# Altium PCB PCB1.PcbDoc
Units mm, origin at the board's own origin, x right, y up, seen from the top; angles counter-clockwise.
Board outline 70 x 55 mm, 2 copper layers (Top Layer, Bottom Layer); 32 components, 37 nets, 134 pads, 36 vias.
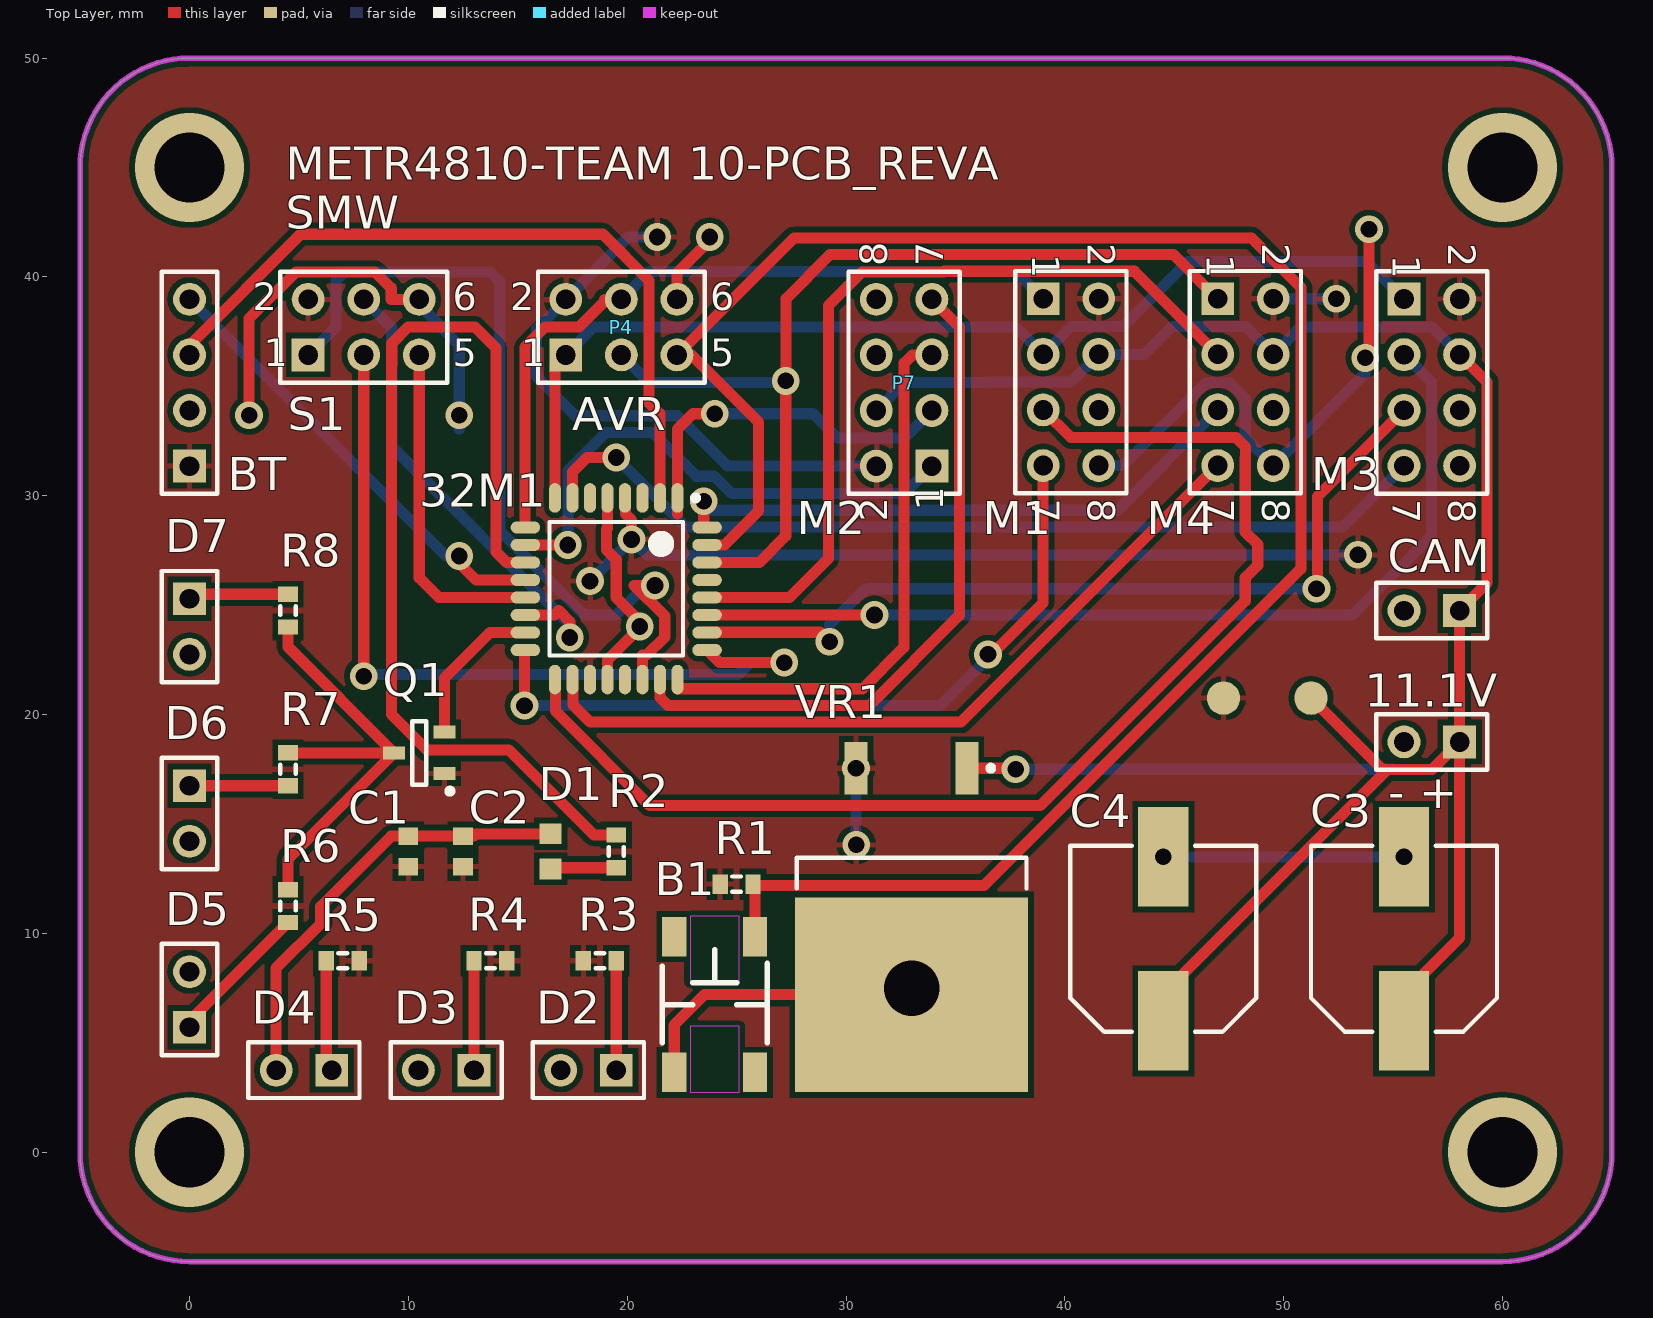
[diagram p0: Top Layer view]
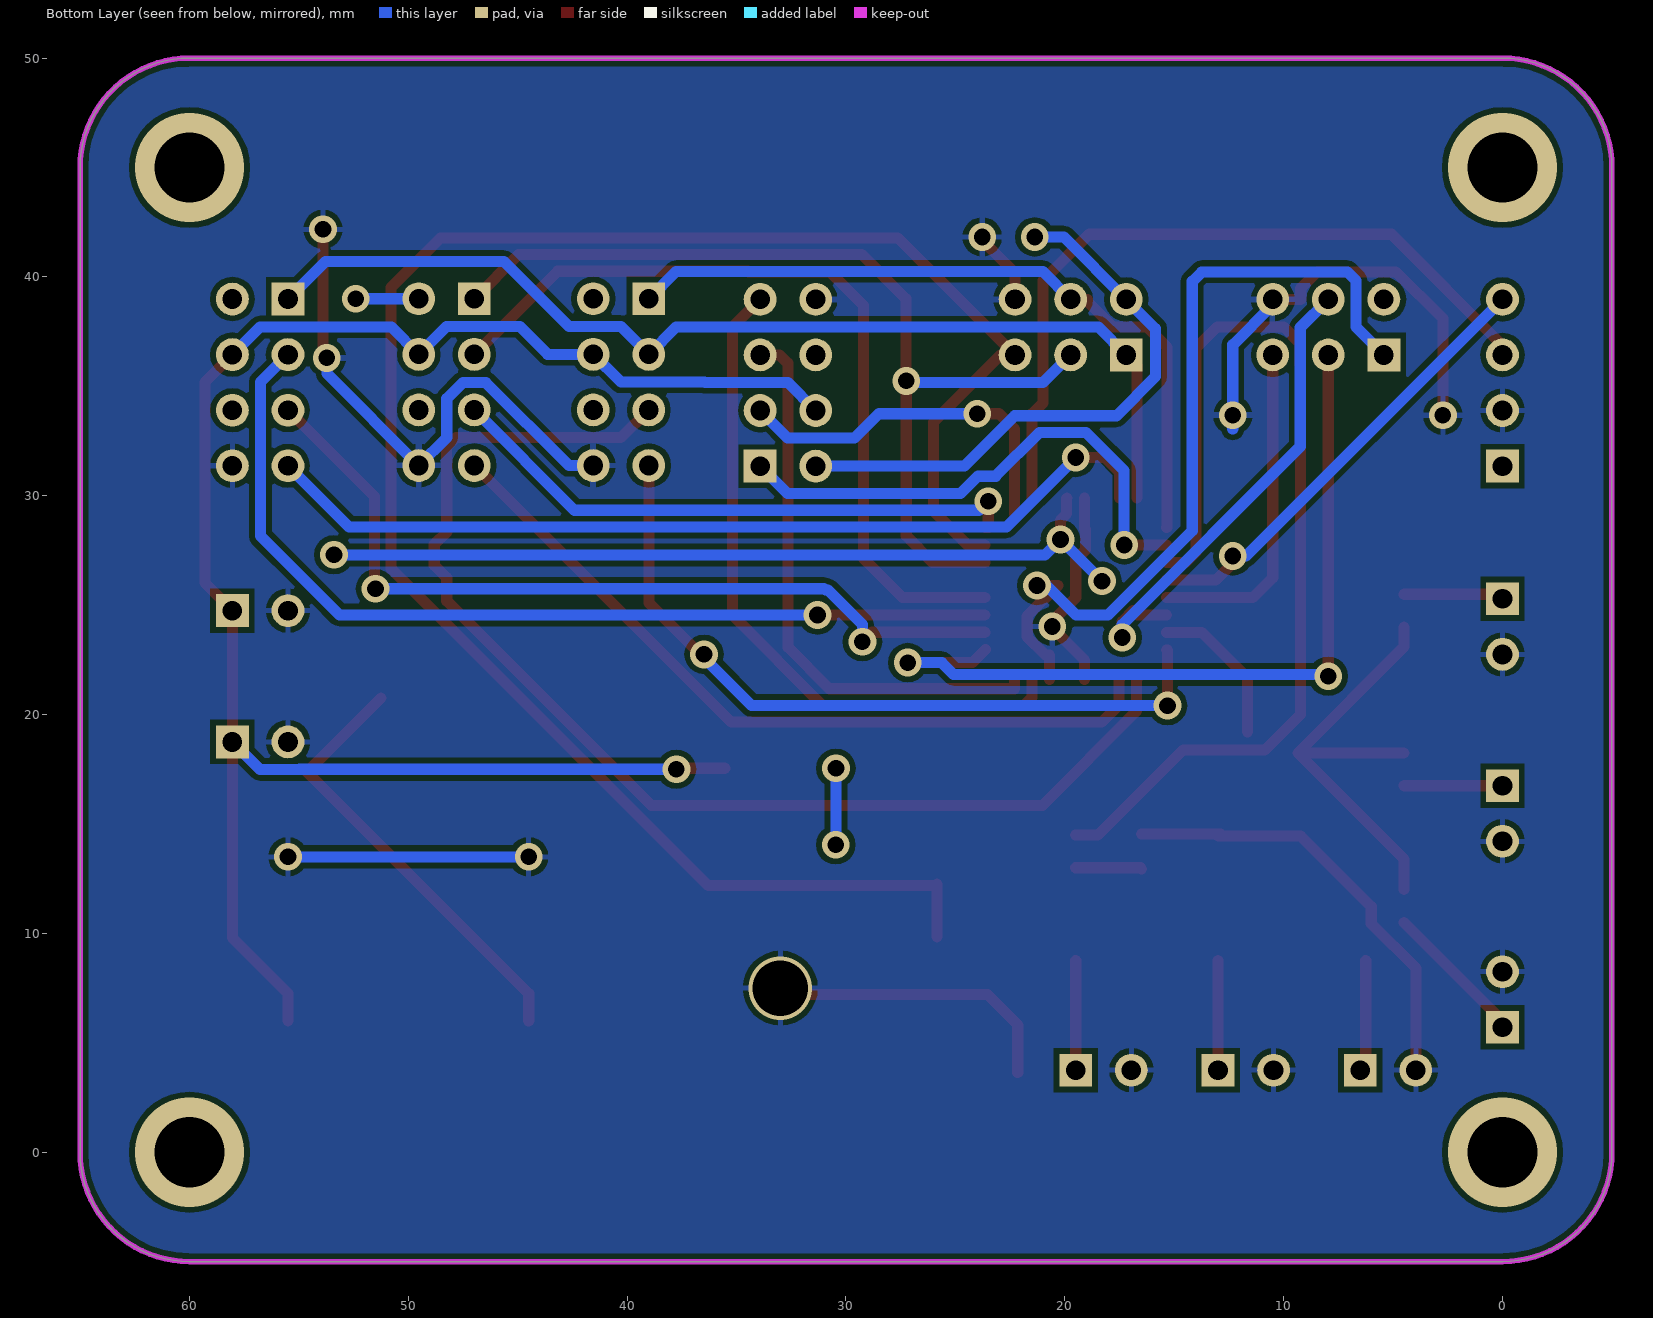
[diagram p1: Bottom Layer view, seen from below]

## Layer stack, top to bottom
Top Solder: solder mask 0.0102, Solder Resist, Dk 3.5
Top Layer: signal copper 0.0356
Dielectric 1: dielectric 0.32, FR-4, Dk 4.8
Bottom Layer: signal copper 0.0356
Bottom Solder: solder mask 0.0102, Solder Resist, Dk 3.5

## Board outline
-5,0 -5,45 cw(c0,45) 0,50 60,50 cw(c60,45) 65,45 65,0 cw(c60,0) 60,-5 0,-5 cw(c0,0)

## Design rules (kind name [scope] priority, off if disabled: settings)
Clearance [All] p1: gap=0.254
HoleSize [All] p1: absolutevalues=TRUE maxlimit=4.064 minlimit=0.762 maxpercent=80.000 minpercent=20.000
HoleToHoleClearance [All] p1: gap=0.152 allowstackedmicrovias=TRUE
MinimumSolderMaskSliver [All] p1: minsoldermaskwidth=0.01
PolygonConnect [All] p1: connectstyle=Relief reliefconductorwidth=0.254 reliefentries=4 polygonreliefangle="90 Angle" airgapwidth=0.254
RoomDefinition Sheet1 [InComponentClass('Sheet1')] p1: confinementstyle=ConfineIn formatcopy=TRUE lockcomponents=FALSE outline -1.75,1.75 61,1.75 61,44.5 -1.75,44.5
RoutingVias [All] p1: holewidth=0.762 width=1.27 viastyle="Through Hole" minholewidth=0.762 minwidth=1.27 maxholewidth=1.524 maxwidth=3.048
SilkToSilkClearance [All] p1: silktosilkclearance=0.01
SilkToSolderMaskClearance [IsPad] p1: minsilkscreentomaskgap=0.01 clearancetoexposedcopper=TRUE
SolderMaskExpansion [All] p1: expansion=0.102
Width [All] p1: maxlimit=2.032 minlimit=0.254 preferedwidth=0.508
25 further rules are at their usual default settings.

## Components (designator, comment, footprint, x,y, rotation, side; value= is the part's Value field where it differs from the comment)
32M1 "ATmega32M1-AU" 32A_L 19.5,25.75 r270 top (schematic designator U1)
"- +" "Header 2" HDR1X2 58.04,18.75 r180 top (schematic designator P3)
B1 "Button" "SMT Tactile Button" 24,6.75 r90 top
BT "Header 4" HDR1X4 0,31.355 r90 top (schematic designator P8)
C1 "Cap" 1608[0603] 10,13.75 r270 top
C2 "Cap" 1608[0603] 12.5,13.75 r270 top
C3 "Cap Pol2" CAPAE9983X105M 55.5,9.75 r90 top
C4 "Cap Pol2" CAPAE9983X105M 44.5,9.75 r90 top
CAM "Header 2" HDR1X2 58.04,24.75 r180 top (schematic designator P2)
D1 "LED1" L0603 16.5,13.75 r90 top
D2 "LED1" HDR1X2 19.5,3.75 r180 top
D3 "LED1" HDR1X2 13,3.75 r180 top
D4 "LED1" HDR1X2 6.5,3.75 r180 top
D5 "LED1" HDR1X2 0,5.71 r90 top
D6 "LED1" HDR1X2 0,16.75 r270 top
D7 "LED1" HDR1X2 0,25.29 r270 top
M1 "Header 4X2" HDR2X4 39.01,39 r270 top (schematic designator P5)
M3 "Header 4X2" HDR2X4 55.5,38.99 r270 top (schematic designator P9)
M4 "Header 4X2" HDR2X4 46.985,39 r270 top (schematic designator P10)
P4 "AVR" HDR2X3 17.195,36.435 r0 top
P7 "M2" HDR2X4 33.925,31.355 r90 top
Q1 "MOSFET-P" SOT23-3 10.5,18.25 r180 top
R1 "Res3" J1-0603 25,12.25 r180 top
R2 "Res3" J1-0603 19.5,13.75 r90 top
R3 "Res3" J1-0603 18.75,8.75 r180 top
R4 "Res3" J1-0603 13.75,8.75 r0 top
R5 "Res3" J1-0603 7,8.75 r0 top
R6 "Res3" J1-0603 4.5,11.25 r90 top
R7 "Res3" J1-0603 4.5,17.5 r90 top
R8 "Res3" J1-0603 4.5,24.75 r270 top
S1 "Header 3X2" HDR2X3 5.42,36.435 r0 top (schematic designator P1)
VR1 "Volt Reg" D2PAK_N 33,10.75 r270 top

## Footprints (in the part's own frame and the unit in brackets; to place one, negate y for a bottom-side part, rotate by r counter-clockwise, add the part's x,y. Pads: shape width x height; smd on the part's side, far side on the other; paste and mask are expansions set on the pad)
32A_L [mm] "Thin QFP, 32-Leads, Body 7x7mm, Pitch 0.8mm, IPC High Density"
  oval 1.35x0.55 smd: 1(-4.15,2.8) 2(-4.15,2) 3(-4.15,1.2) 4(-4.15,0.4) 5(-4.15,-0.4) 6(-4.15,-1.2) 7(-4.15,-2) 8(-4.15,-2.8) 17(4.15,-2.8) 18(4.15,-2) 19(4.15,-1.2) 20(4.15,-0.4) 21(4.15,0.4) 22(4.15,1.2) 23(4.15,2) 24(4.15,2.8)
  oval 0.55x1.35 smd: 9(-2.8,-4.15) 10(-2,-4.15) 11(-1.2,-4.15) 12(-0.4,-4.15) 13(0.4,-4.15) 14(1.2,-4.15) 15(2,-4.15) 16(2.8,-4.15) 25(2.8,4.15) 26(2,4.15) 27(1.2,4.15) 28(0.4,4.15) 29(-0.4,4.15) 30(-1.2,4.15) 31(-2,4.15) 32(-2.8,4.15)
  silkscreen extent -4.27,-3.05 3.05,3.75, body extent -3.5,-3.5 3.5,3.5, height 1.2
1608[0603] [mm] "Chip Capacitor, Body 1.6x0.8mm, IPC High Density"
  rect 0.8x0.9 smd: 1(-0.7,0) 2(0.7,0)
  body extent -0.87,-0.48 0.87,0.48, height 1.3
CAPAE9983X105M [mm] "Aluminum Electrolytic Capacitor, Body 8.30x8.30x10.50mm, IPC Low Density"
  rect 4.55x2.3 smd: 1(-3.75,0) 2(3.75,0)
  silkscreen extent -4.25,-4.25 4.25,4.25, body extent -4.25,-4.25 4.25,4.25, height 10.5
D2PAK_N [mm] "D2-PAK, 4-Leads, Body 8.8x10.4mm, Pitch 2.54mm, Lead Span 15.1mm, IPC Medium Density"
  rect 2.4x1.05 smd: 1(-6.8,2.54) 3(-6.8,-2.54)
  rect 8.9x10.65 smd: 2(3.55,0)
  silkscreen extent -6.92,-5.25 -1.3,5.25, body extent -2.7,-5.28 6.3,5.28, height 4.69
HDR1X2 [mm] "Connector; Header; 2 Position"
  rect 1.5x1.5 hole 0.9: 1(0,0)
  round 1.5 hole 0.9: 2(2.54,0)
  silkscreen extent -1.27,-1.27 3.81,1.27
HDR1X4 [mm] "Connector; Header; 4 Position"
  rect 1.5x1.5 hole 0.9: 1(0,0)
  round 1.5 hole 0.9: 2(2.54,0) 3(5.08,0) 4(7.62,0)
  silkscreen extent -1.27,-1.27 8.89,1.27
HDR2X3 [mm] "Connector; Header; 3x2 Position"
  rect 1.5x1.5 hole 0.9: 1(0,0)
  round 1.5 hole 0.9: 2(0,2.54) 3(2.54,0) 4(2.54,2.54) 5(5.08,0) 6(5.08,2.54)
  silkscreen extent -1.27,-1.27 6.35,3.81
HDR2X4 [mm] "Connector; Header; 4x2 Position"
  rect 1.5x1.5 hole 0.9: 1(0,0)
  round 1.5 hole 0.9: 2(0,2.54) 3(2.54,0) 4(2.54,2.54) 5(5.08,0) 6(5.08,2.54) 7(7.62,0) 8(7.62,2.54)
  silkscreen extent -1.27,-1.27 8.89,3.81
J1-0603 [mm] "Chip Resistor, Body 1.6x0.8mm, IPC High Density"
  rect 0.7x0.9 smd: 1(-0.75,0) 2(0.75,0)
  silkscreen extent -0.2,-0.35 0.2,0.35, body extent -0.85,-0.48 0.85,0.48, height 0.9
L0603 [mm]
  rect 0.95x1 smd: 1(-0.8,0) 2(0.8,0)
"SMT Tactile Button" [mm]
  rect 1.8x1.1 smd: 1(3.1,1.85) 2(-3.1,1.85) 3(-3.1,-1.85) 4(3.1,-1.85)
  Top Layer keep-out region: -4,-1.125 -1,-1.125 -1,1.125 -4,1.125
  Top Layer keep-out region: 1.025,-1.125 4.025,-1.125 4.025,1.125 1.025,1.125
  silkscreen extent -1.75,-2.4 2.5,2.4
SOT23-3 [mm]
  rect 1x0.6 smd: 1(-1.15,0.95) 2(-1.15,-0.95) 3(1.15,0)
  silkscreen extent -1.53,-1.45 0.33,1.87

## Part data
32M1: "8-bit AVR Microcontroller, 2.7-5.5V, 16MHz, 32KB Flash, 1KB EEPROM, 2KB SRAM, Industrial Grade (-40° to +85°C), 32-Pin TQFP"
"- +" CAM: "Header, 2-Pin"
B1: library part Switch
BT: "Header, 4-Pin"
C1 C2: "Capacitor"
C3 C4: "Polarized Capacitor (Axial)"
D1 D2 D3 D4 D5 D6 D7: "Typical RED GaAs LED"
M1 M3 M4: "Header, 4-Pin, Dual row"
P4: library part "Header 3X2", "Header, 3-Pin, Dual row"
P7: library part "Header 4X2", "Header, 4-Pin, Dual row"
Q1: "P-Channel MOSFET"
R1 R2 R3 R4 R5 R6 R7 R8: "Resistor"
S1: "Header, 3-Pin, Dual row"
VR1: "Voltage Regulator"

## Free pads (board coordinates)
  round 1.524 smd: 2(47.25,20.75) 2(51.25,20.75)

## Via types
v1: diameter 1.27, hole 0.762, Top Layer to Bottom Layer, 31 vias
v2: diameter 5, hole 3.2, Top Layer to Bottom Layer, 4 vias
v3: diameter 2.896, hole 2.54, Top Layer to Bottom Layer, 1 vias

## Nets (pads, with @x,y where several pads share a name; then routed paths per layer and width w, separated by ;. In a path a pad name is that pad's centre, name@x,y a point inside that pad or via, vN(x,y) a via of type N, cw(c..) or ccw(c..) an arc to the next point about the centre after c; other vN are vias at no path point)
3S(11.1V): "- +.1" C3.1 C4.1 CAM.1 M1.4 M3.4 M4.4 P7.4 pad.2@51.25,20.75 VR1.1 | length 109.8
  Top Layer w0.508: VR1.1 37.7,17.55 v1(37.75,17.5) ; C4.1 44.5,7.25 54.742,17.492 ; pad.2@51.25,20.75 54.508,17.492 54.742,17.492 ; C3.1 55.5,7.25 58.04,9.79 58.04,18.75 ; M3.4 59.3,35.19 59.3,26.01 CAM.1 58.04,18.75 ; 54.742,17.492 56.782,17.492 58.04,18.75
  Bottom Layer w0.508: P7.4 32.658,35.168 36.44,35.168 36.465,35.194 40.284,35.194 M1.4 43.628,36.46 44.902,37.734 48.251,37.734 M4.4 50.773,37.708 56.782,37.708 M3.4 ; v1(37.75,17.5) 54.971,17.5 54.979,17.492 56.782,17.492 58.04,18.75
5V: 32M1.4 32M1.19 BT.1 C1.2 C2.2 M1.2 M3.2 M4.2 P4.2 P7.2 pad.2@47.25,20.75 Q1.1 R1.2 R3.2 R4.2 R5.2 S1.2 VR1.3 | length 71.3
  Top Layer w0.508: 32M1.4 19.917,29.883 19.917,29.176 20.201,28.892 v1(20.201,28.001)
  Bottom Layer w0.508: v1(18.3,26.1) v1(20.201,28.001) 20.9,27.302 20.9,27.3 v1(53.4,27.3) ; v1(21.375,41.825) 20.045,41.825 P4.2 15.85,37.63 15.85,35.45 17.645,33.655 22.289,33.655 24.589,31.355 P7.2 ; v1(30.46,17.55) 30.46,14.058 v1(30.468,14.05) ; M4.2 v1(52.4,39)
GND: 32M1.5 32M1.20 "- +.2" B1.2 BT.2 C1.1 C2.1 C3.2 C4.2 CAM.2 D1.2 D2.2 D3.2 D4.2 D5.2 D6.2 D7.2 M1.8 M3.8 M4.8 P4.6 P7.8 S1.6 VR1.2 | length 103.1
  Top Layer w0.508: D5.2 D5.2@0,8.471 ; v1@2.725,34.25 2.725,38.1 4.858,40.233 8.481,40.233 9.218,39.496 9.218,38.975 S1.6 ; D4.2 3.96,8.41 6,10.45 6,11.23 9.22,14.45 C1.1 C2.1 12.987,14.45 12.887,14.55 D1.2 ; 32M1.20 19.1,22.5 20.6,24 20.725,24.125 19.5,25.35 19.5,27.086 19.058,27.528 19.058,28.475 19.1,28.517 32M1.5 ; B1.2 22.15,5.806 23.544,7.2 VR1.2 ; P4.6 22.275,40.175 23.725,41.625 v1@23.775,41.625 ; v1@53.534,36.3 53.9,36.666 v1(53.9,42.175)
  Bottom Layer w0.508: S1.6 10.5,38.725 12.325,36.9 v1(12.325,33.678) v1@12.325,33.05 ; M1.8 42.666,31.38 46.464,35.178 47.506,35.178 48.243,34.441 48.243,32.662 M4.8 53.725,35.58 v1(53.725,36.3) ; v1(44.5,13.5) v1(55.5,13.5)
  other v1: 20.575,24.025 2.725,33.678 23.775,41.825
  other v3: 33,7.5
HI-BEAM: 32M1.15 Q1.2 | length 7
  Top Layer w0.508: Q1.2 11.65,21.668 13.732,23.75 32M1.15
M1.1: 32M1.17 M1.5 | length 56.1
  Top Layer w0.508: 32M1.17 16.717,21.6 16.717,20.157 21.024,15.85 29.717,15.85 29.725,15.842 38.889,15.842 48.243,25.196 48.243,26.252 48.818,26.827 48.818,27.773 48.243,28.348 48.243,31.717 48.251,31.725 48.251,32.222 47.819,32.654 40.276,32.654 M1.5
M1.2: 32M1.16 M1.7 | length 34.6
  Top Layer w0.508: v1(15.307,20.411) 15.307,22.95 32M1.16 ; v1(36.487,22.75) 36.65,22.75 39.01,25.11 M1.7
  Bottom Layer w0.508: v1(15.307,20.411) 34.311,20.411 36.487,22.588 v1(36.487,22.75)
M2.1: 32M1.24 P7.5 | length 26
  Top Layer w0.508: 32M1.24 22.3,21.179 30.756,21.179 32.655,23.078 32.655,36.054 33.036,36.435 P7.5
M2.2: 32M1.23 P7.7 | length 31.3
  Top Layer w0.508: 32M1.23 21.5,20.777 21.86,20.417 31.072,20.417 35.195,24.54 35.195,37.705 P7.7
M3.1: 32M1.26 M3.5 | length 39.3
  Top Layer w0.508: 32M1.26@23.65,23.762 28.813,23.762 v1(29.25,23.325) ; v1(51.5,25.75) 51.553,25.803 51.553,29.963 M3.5
  Bottom Layer w0.508: v1(29.25,23.325) 29.25,24.116 30.827,25.693 30.943,25.693 31,25.75 v1(51.5,25.75)
M3.2: 32M1.7 M3.7 | length 41.9
  Top Layer w0.508: 32M1.7 17.5,31.079 18.171,31.75 v1(19.5,31.75)
  Bottom Layer w0.508: v1(19.5,31.75) 22.677,28.573 52.703,28.573 M3.7
M4.1: 32M1.32 M4.5 | length 26.9
  Top Layer w0.508: v1(23.5,29.75) 23.5,28.55 32M1.32
  Bottom Layer w0.508: v1(23.5,29.75) 23.915,29.335 42.4,29.335 M4.5
M4.2: 32M1.18 M4.7 | length 35.8
  Top Layer w0.508: 32M1.18 17.517,21.6 17.517,20.435 18.297,19.655 35.26,19.655 M4.7
MISO: 32M1.8 M1.3 M3.1 P4.1 | length 48.6
  Top Layer w0.508: 32M1.8 16.7,35.94 P4.1
  Bottom Layer w0.508: P4.1 18.468,37.708 37.762,37.708 M1.3 40.284,37.734 42.663,37.734 45.634,40.706 53.784,40.706 M3.1
MOSI: 32M1.9 M1.1 P4.4 | length 33.9
  Top Layer w0.508: 32M1.9 15.332,28.55 15.332,36.794 16.247,37.708 17.796,37.708 18.964,38.877 18.964,38.975 P4.4
  Bottom Layer w0.508: P4.4 21.008,40.248 37.762,40.248 M1.1
NetD1_1: D1.1 R2.1 | length 3
  Top Layer w0.508: D1.1 16.55,13 R2.1
NetD2_1: D2.1 R3.1 | length 5
  Top Layer w0.508: D2.1 R3.1
NetD3_1: D3.1 R4.1 | length 5
  Top Layer w0.508: D3.1 R4.1
NetD4_1: D4.1 R5.1 | length 5.1
  Top Layer w0.508: R5.1 6.25,4 D4.1
NetD5_1: D5.1 R6.1 | length 6.7
  Top Layer w0.508: D5.1 0,6 R6.1
NetD6_1: D6.1 R7.1 | length 4.5
  Top Layer w0.508: D6.1 R7.1
NetD7_1: D7.1 R8.1 | length 4.6
  Top Layer w0.508: D7.1 0.21,25.5 R8.1
NetQ1_3: Q1.3 R6.2 R7.2 R8.2 | length 20.9
  Top Layer w0.508: R6.2 4.5,13.4 Q1.3 ; R7.2 Q1.3 ; R8.2 4.5,23.1 Q1.3
PULSE: 32M1.11 R2.2 | length 45.8
  Top Layer w0.508: 32M1.11 14.483,26.95 14,27.433 14,36.75 13.042,37.708 9.994,37.708 9.242,36.956 9.242,35.992 9.236,35.986 9.236,20.005 10.862,18.379 14.603,18.379 18.482,14.5 R2.2
PWMM2.1: 32M1.10 P7.1 | length 24.4
  Top Layer w0.508: 32M1.10 v1(17.288,27.75)
  Bottom Layer w0.508: v1(17.288,27.75) 17.288,31.154 19.026,32.893 21.157,32.893 23.157,30.893 23.973,30.893 24.769,30.097 32.667,30.097 P7.1
PWMM2.2: 32M1.1 P7.3 | length 16.8
  Top Layer w0.508: 22.3,29.174 32M1.1 22.3,33.05 23,33.75 v1(24,33.75)
  Bottom Layer w0.508: v1(24,33.75) 28.5,33.75 29.613,32.637 32.667,32.637 P7.3
PWMM3.1: 32M1.3
PWMM3.2: 32M1.27 M3.3 | length 43.4
  Top Layer w0.508: 32M1.27 v1(31.3,24.55)
  Bottom Layer w0.508: v1(31.3,24.55) 53.152,24.55 56.76,28.158 56.76,35.19 M3.3
PWMM4.1: 32M1.30 M4.1 P4.3 | length 44.4
  Top Layer w0.508: 32M1.30 26.037,26.95 27.245,28.158 v1@27.245,35.25 ; v1(27.25,35.25) 27.25,39 29.27,41.02 44.965,41.02 M4.1
  Bottom Layer w0.508: P4.3 20.993,35.177 27.177,35.177 v1(27.25,35.25)
PWMM4.2: 32M1.28 M4.3 | length 37.9
  Top Layer w0.508: 32M1.28 27.409,25.35 29.201,27.142 29.201,38.701 30.733,40.233 34.448,40.233 34.473,40.258 43.187,40.258 M4.3
PWMM5.1: 32M1.29
RESET: 32M1.31 B1.4 P4.5 R1.1 | length 89.9
  Top Layer w0.508: 32M1.31 24.449,27.75 26,29.301 26,33.366 22.931,36.435 P4.5 27.622,41.782 48.522,41.782 50.791,39.513 50.791,26.666 36.306,12.181 25.919,12.181 25.85,12.25 B1.4
RXD: 32M1.12 BT.4 | length 20.9
  Top Layer w0.508: v1(12.322,27.25) 12.322,26.928 13.1,26.15 32M1.12
  Bottom Layer w0.508: BT.4 11.725,27.25 v1(12.322,27.25)
S1-IN1: 32M1.22 S1.1 | length 38.8
  Top Layer w0.508: 32M1.22 20.7,22.725 20.891,22.725 21.718,23.552 21.718,24.498 20.316,25.9 v1(21.275,25.9)
  Bottom Layer w0.508: S1.1 6.702,37.717 6.702,39.842 7.093,40.233 13.742,40.233 14.175,39.8 14.175,28.403 18.028,24.55 19.484,24.55 20.834,25.9 v1(21.275,25.9)
S1-IN2: 32M1.25 S1.3 | length 37.9
  Top Layer w0.508: v1(7.96,21.75) S1.3 ; 32M1.25@23.633,22.967 32M1.25 24.225,22.375 v1(27.175,22.375)
  Bottom Layer w0.508: v1(7.96,21.75) 8.043,21.833 25.083,21.833 25.625,22.375 v1(27.175,22.375)
S1-IN3: 32M1.13 S1.5 | length 15.4
  Top Layer w0.508: S1.5 10.5,26.25 11.4,25.35 32M1.13
S1-IN4: 32M1.14 S1.4 | length 22.4
  Top Layer w0.508: 32M1.14 16.677,24.55 16.875,24.748 17.375,24.248 v1(17.375,23.525)
  Bottom Layer w0.508: S1.4 9.242,37.693 9.242,32.258 17.375,24.125 v1(17.375,23.525)
TXD: 32M1.2 BT.3 | length 34.6
  Top Layer w0.508: BT.3 0,36.875 5.075,41.95 18.888,41.95 20.996,39.842 20.996,34.25 21.5,33.746 32M1.2
pads on no net: 32M1.6 32M1.21 B1.1 B1.3 M1.6 M3.6 M4.6 P7.6
copper on no net:
  other v2: 0,0 60,0 0,45 60,45

## Polygon pours and split planes (outlines as drawn)
GND on Bottom Layer "GND_L02_P000" (solid, remove dead copper, pour order 0): -20.1,0 -14.875,-7.325 -0.575,-11.35 76.325,-9.95 72,50.75 70,52.75 68,54.75 -7.5,54.75
5V on Top Layer "5V_L01_P002" (solid, remove dead copper, pour order 2): -5.5,-4.75 23.05,-17.225 76,-6.75 78,-4.75 78,55.25 -13,55.25 -14,56.25

## Keep-outs
Keep-Out Layer:
  the board outline again, w0.254

## Silkscreen, mask and mechanical layers (free items; w line width, h text height)
Top Overlay:
  text "METR4810-TEAM 10-PCB_REVA" at 4.4,44.45 h1.52
  text "SMW" at 4.4,42.2 h1.52
  text "11.1V" at 53.7,20.35 h1.52

## Text inside footprints (layer, text, board x,y; h text height)
M1: Top Overlay "2" at 41.042,41.54 h1.27 r270; Top Overlay "1" at 38.502,41.032 h1.27 r270; Top Overlay "7" at 38.502,29.856 h1.27 r270; Top Overlay "8" at 41.042,29.856 h1.27 r270
M3: Top Overlay "2" at 57.532,41.53 h1.27 r270; Top Overlay "1" at 54.992,41.022 h1.27 r270; Top Overlay "7" at 54.992,29.846 h1.27 r270; Top Overlay "8" at 57.532,29.846 h1.27 r270
M4: Top Overlay "2" at 49.017,41.54 h1.27 r270; Top Overlay "1" at 46.477,41.032 h1.27 r270; Top Overlay "7" at 46.477,29.856 h1.27 r270; Top Overlay "8" at 49.017,29.856 h1.27 r270
P4: Top Overlay "6" at 23.799,38.467 h1.27; Top Overlay "5" at 23.799,35.927 h1.27; Top Overlay "2" at 14.655,38.467 h1.27; Top Overlay "1" at 15.163,35.927 h1.27
P7: Top Overlay "2" at 31.893,28.815 h1.27 r90; Top Overlay "1" at 34.433,29.323 h1.27 r90; Top Overlay "7" at 34.433,40.499 h1.27 r90; Top Overlay "8" at 31.893,40.499 h1.27 r90
S1: Top Overlay "6" at 12.024,38.467 h1.27; Top Overlay "5" at 12.024,35.927 h1.27; Top Overlay "2" at 2.88,38.467 h1.27; Top Overlay "1" at 3.388,35.927 h1.27